# Altium PCB Main.PcbDoc (part 1 of 2)
Units mil, origin at the board's own origin, x right, y up, seen from the top; angles counter-clockwise.
Board outline 5100 x 2800 mil, 4 copper layers (Top Layer, Internal Plane 1, Internal Plane 2, Bottom Layer), stack 30.634 mil thick; 235 components, 176 nets, 754 pads, 178 vias.
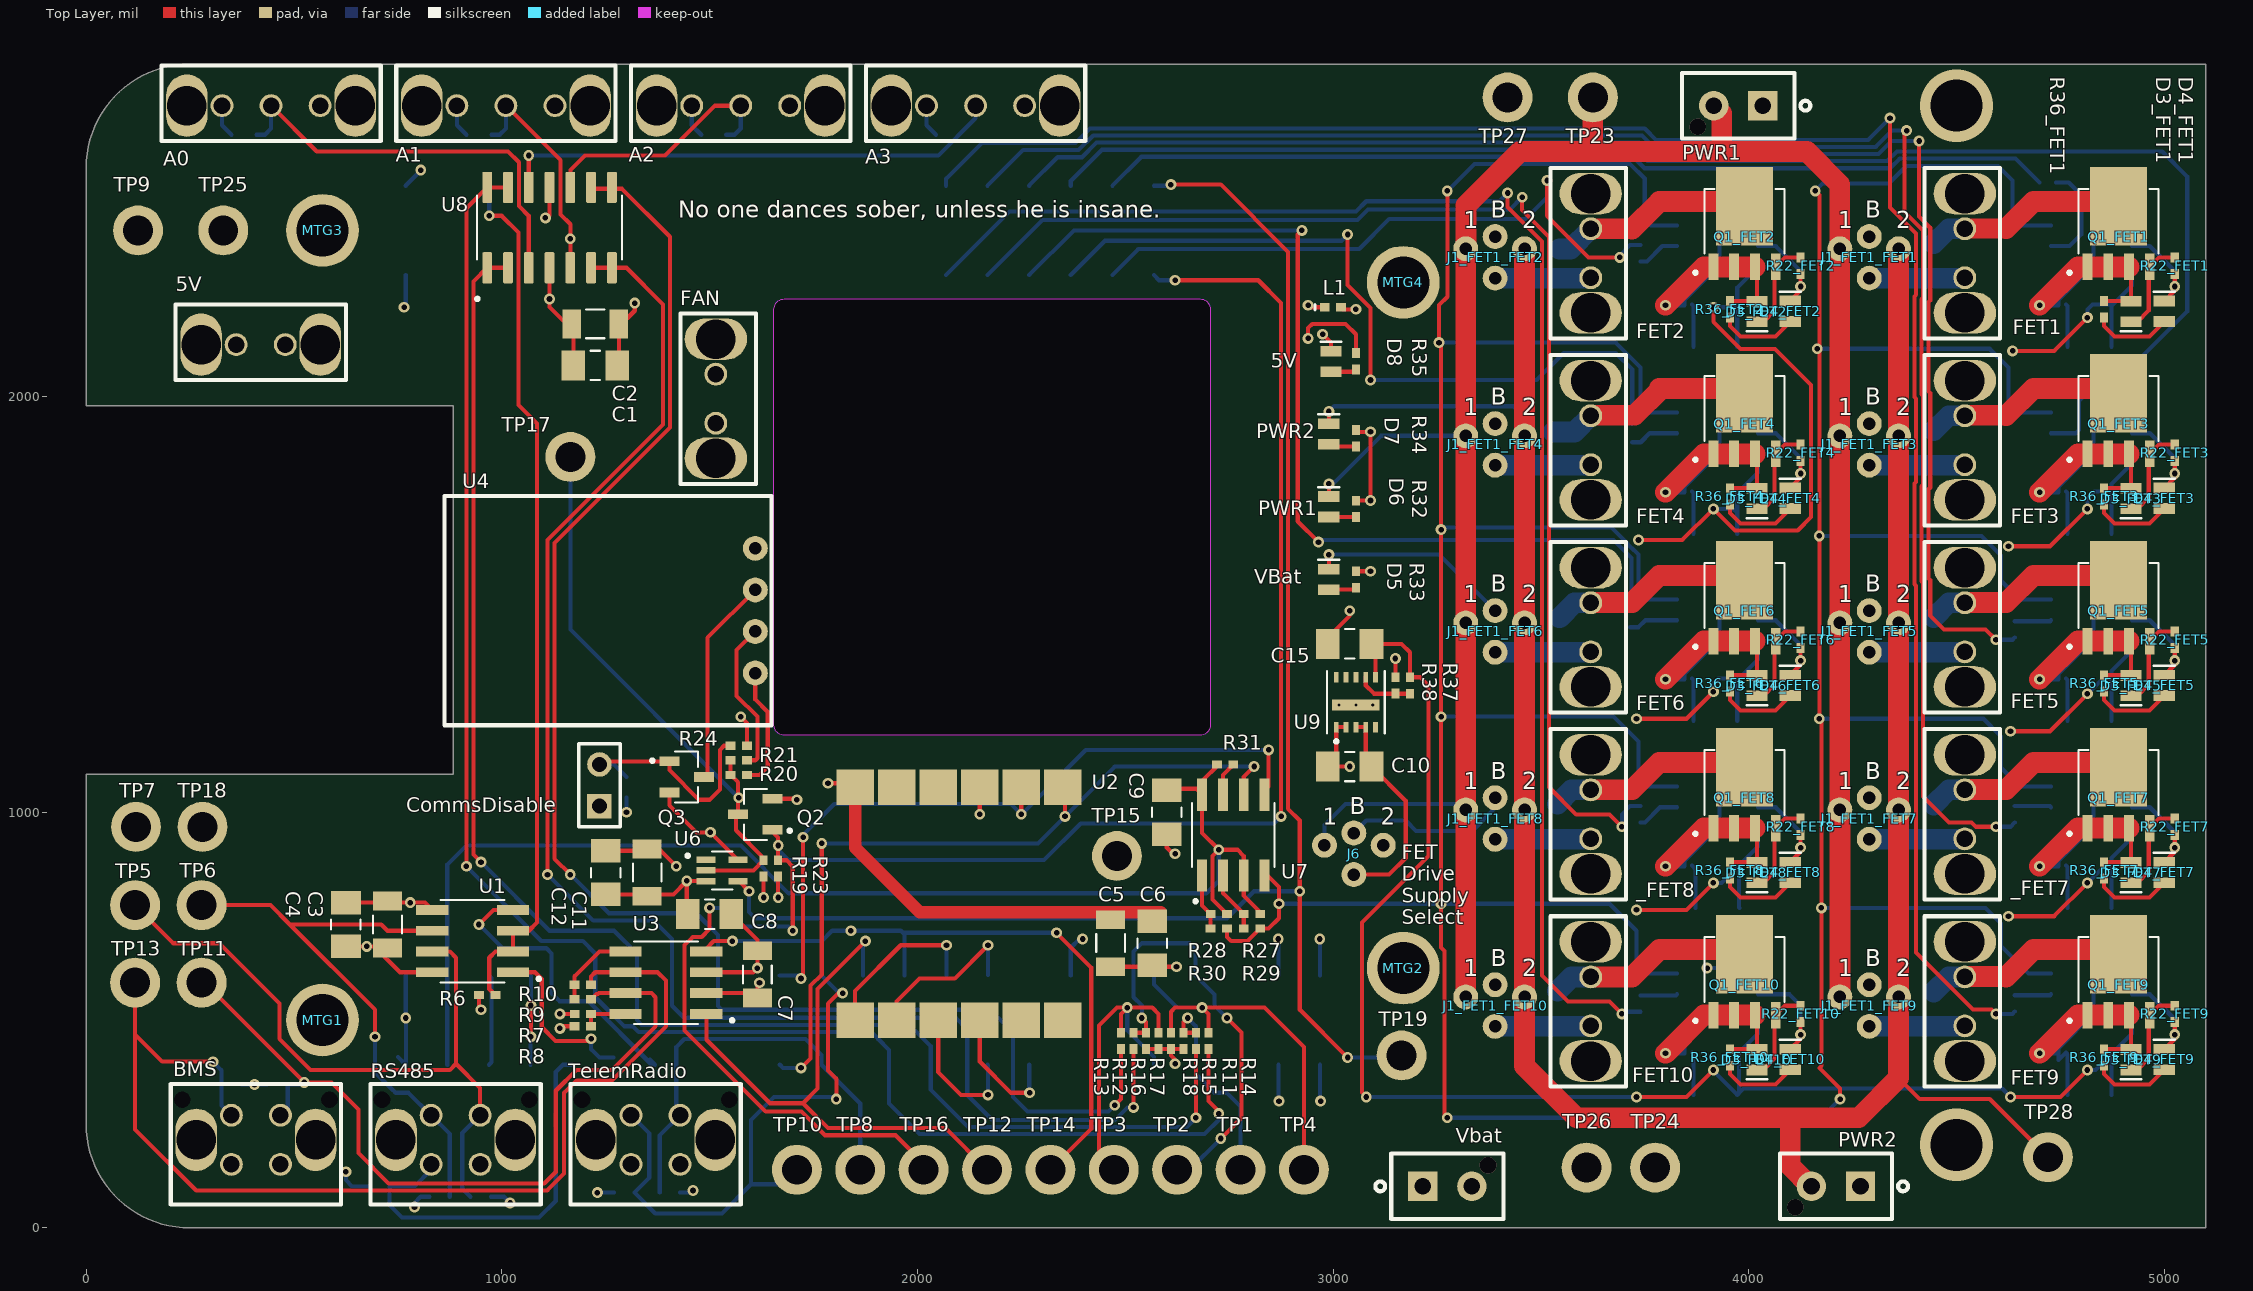
[diagram p0: Top Layer view]
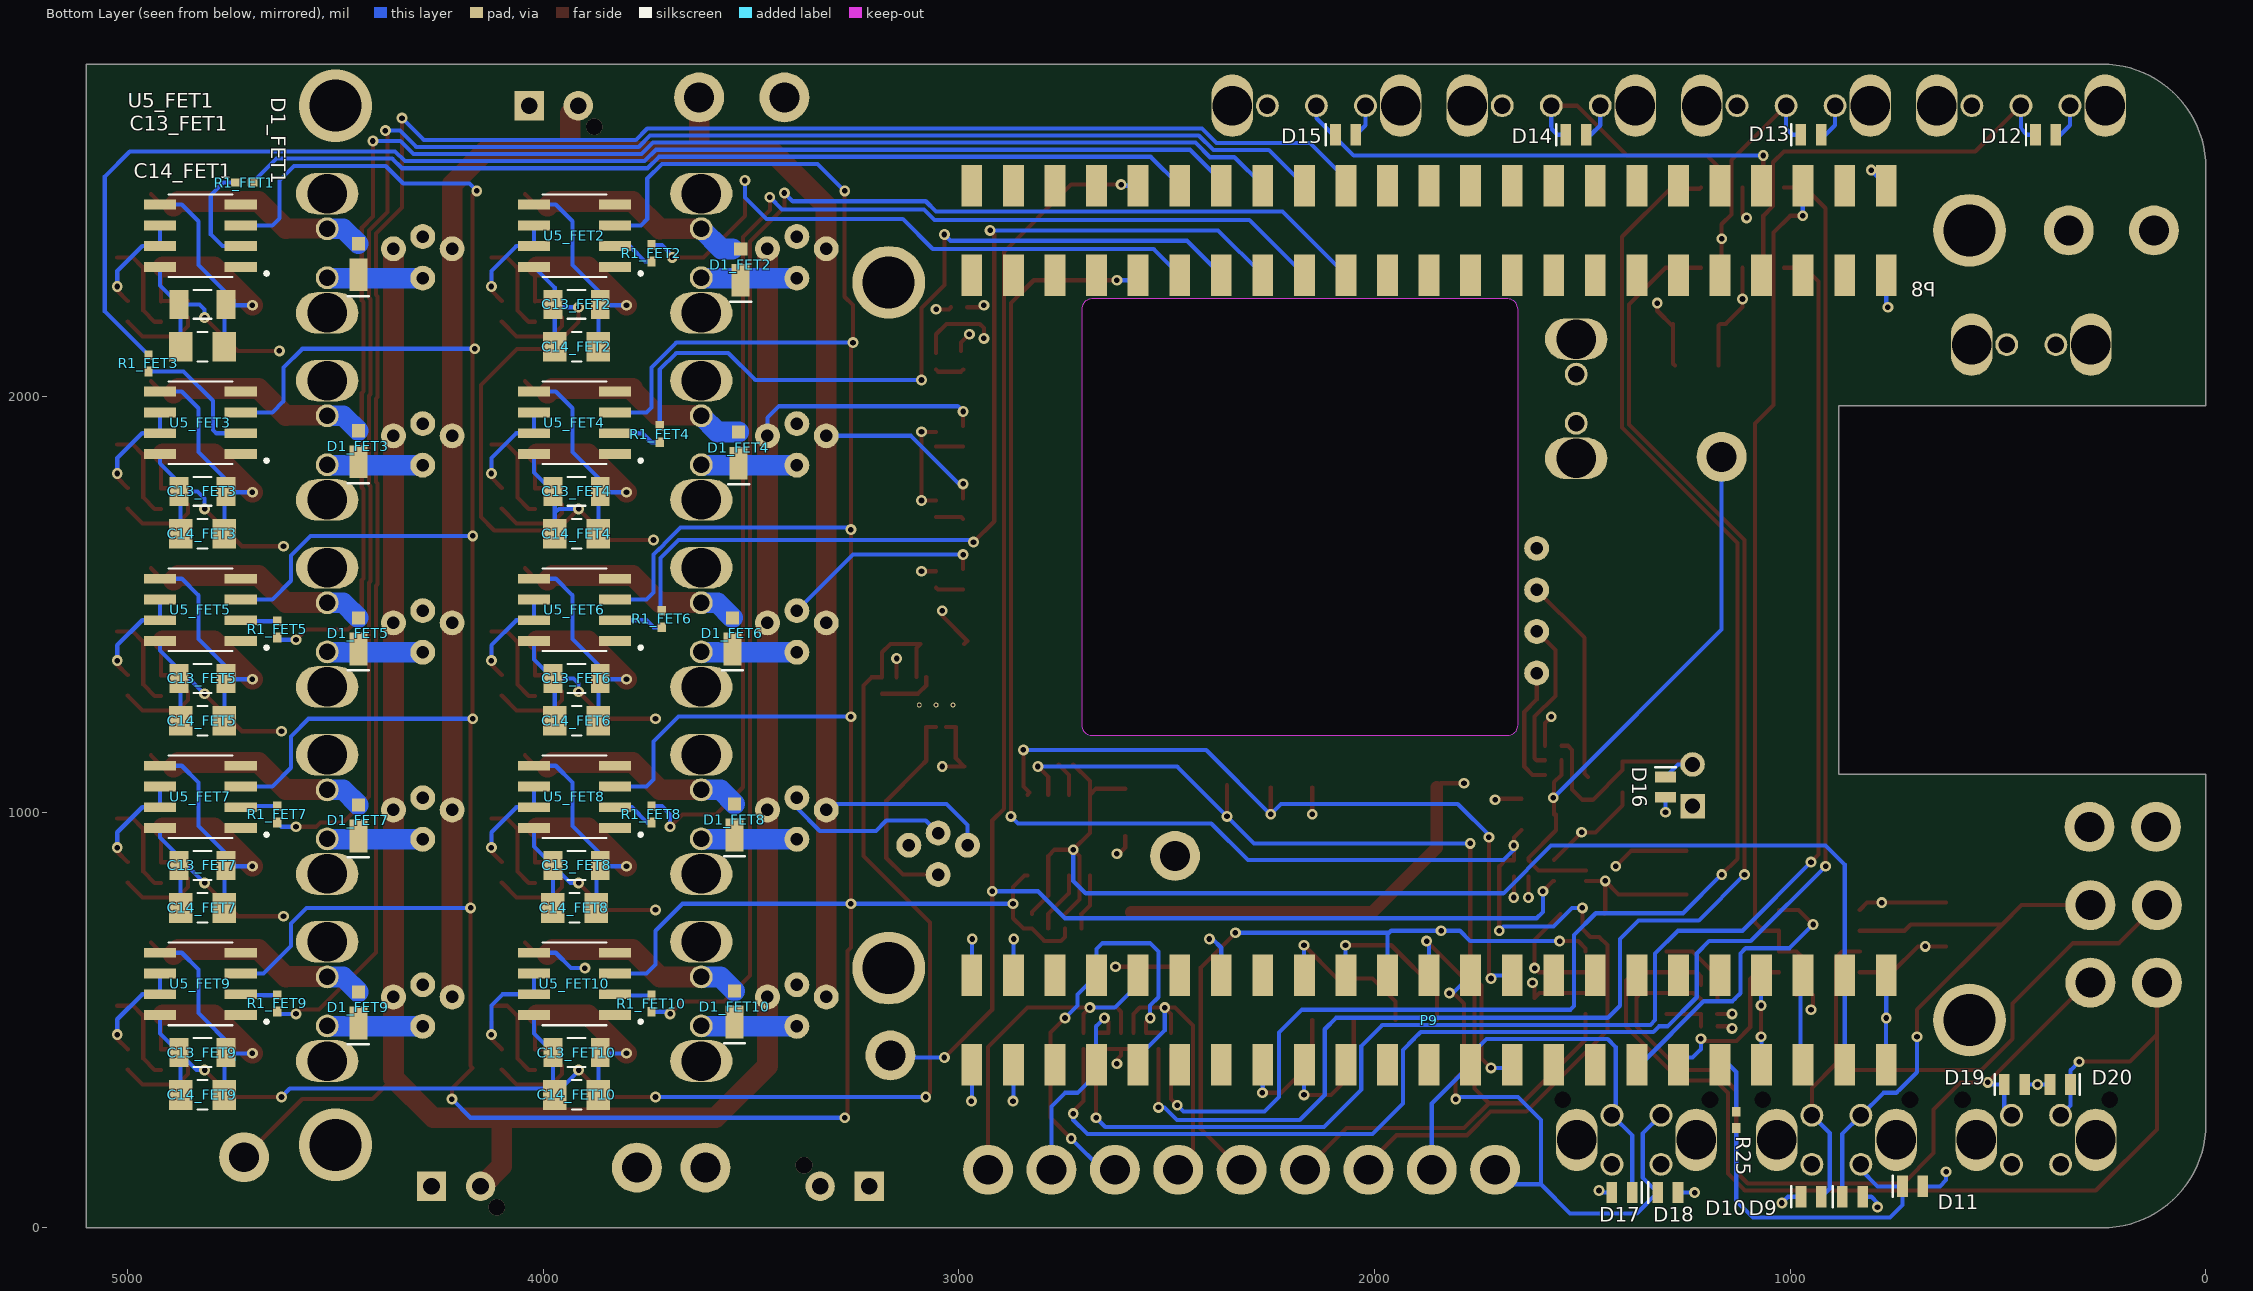
[diagram p1: Bottom Layer view, seen from below]
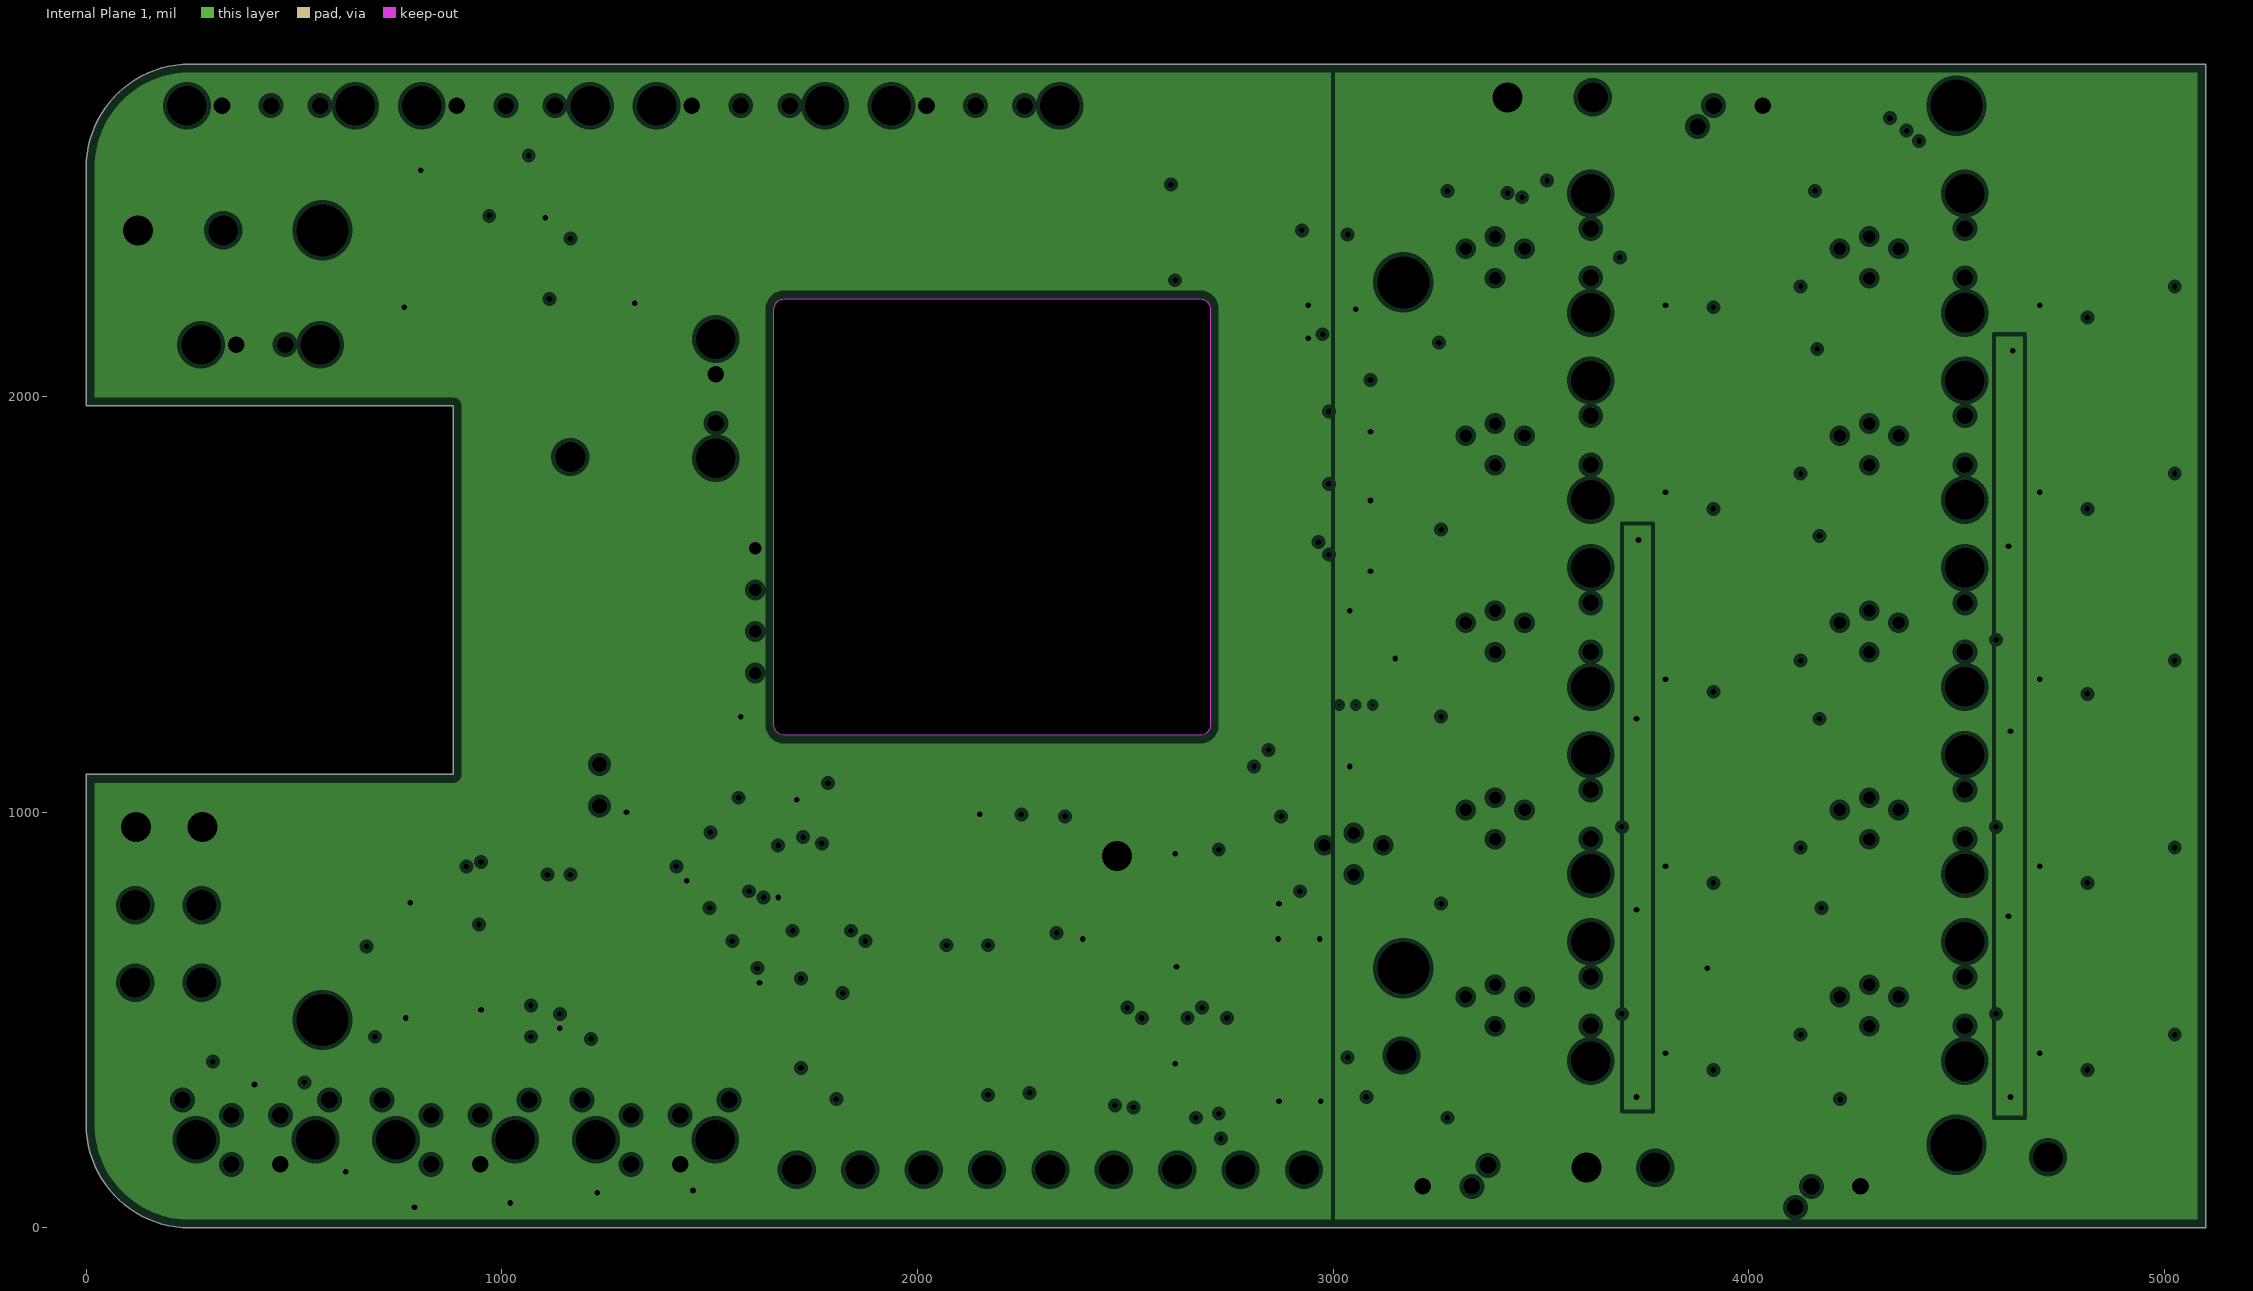
[diagram p2: Internal Plane 1, clearances drawn from the general rule]
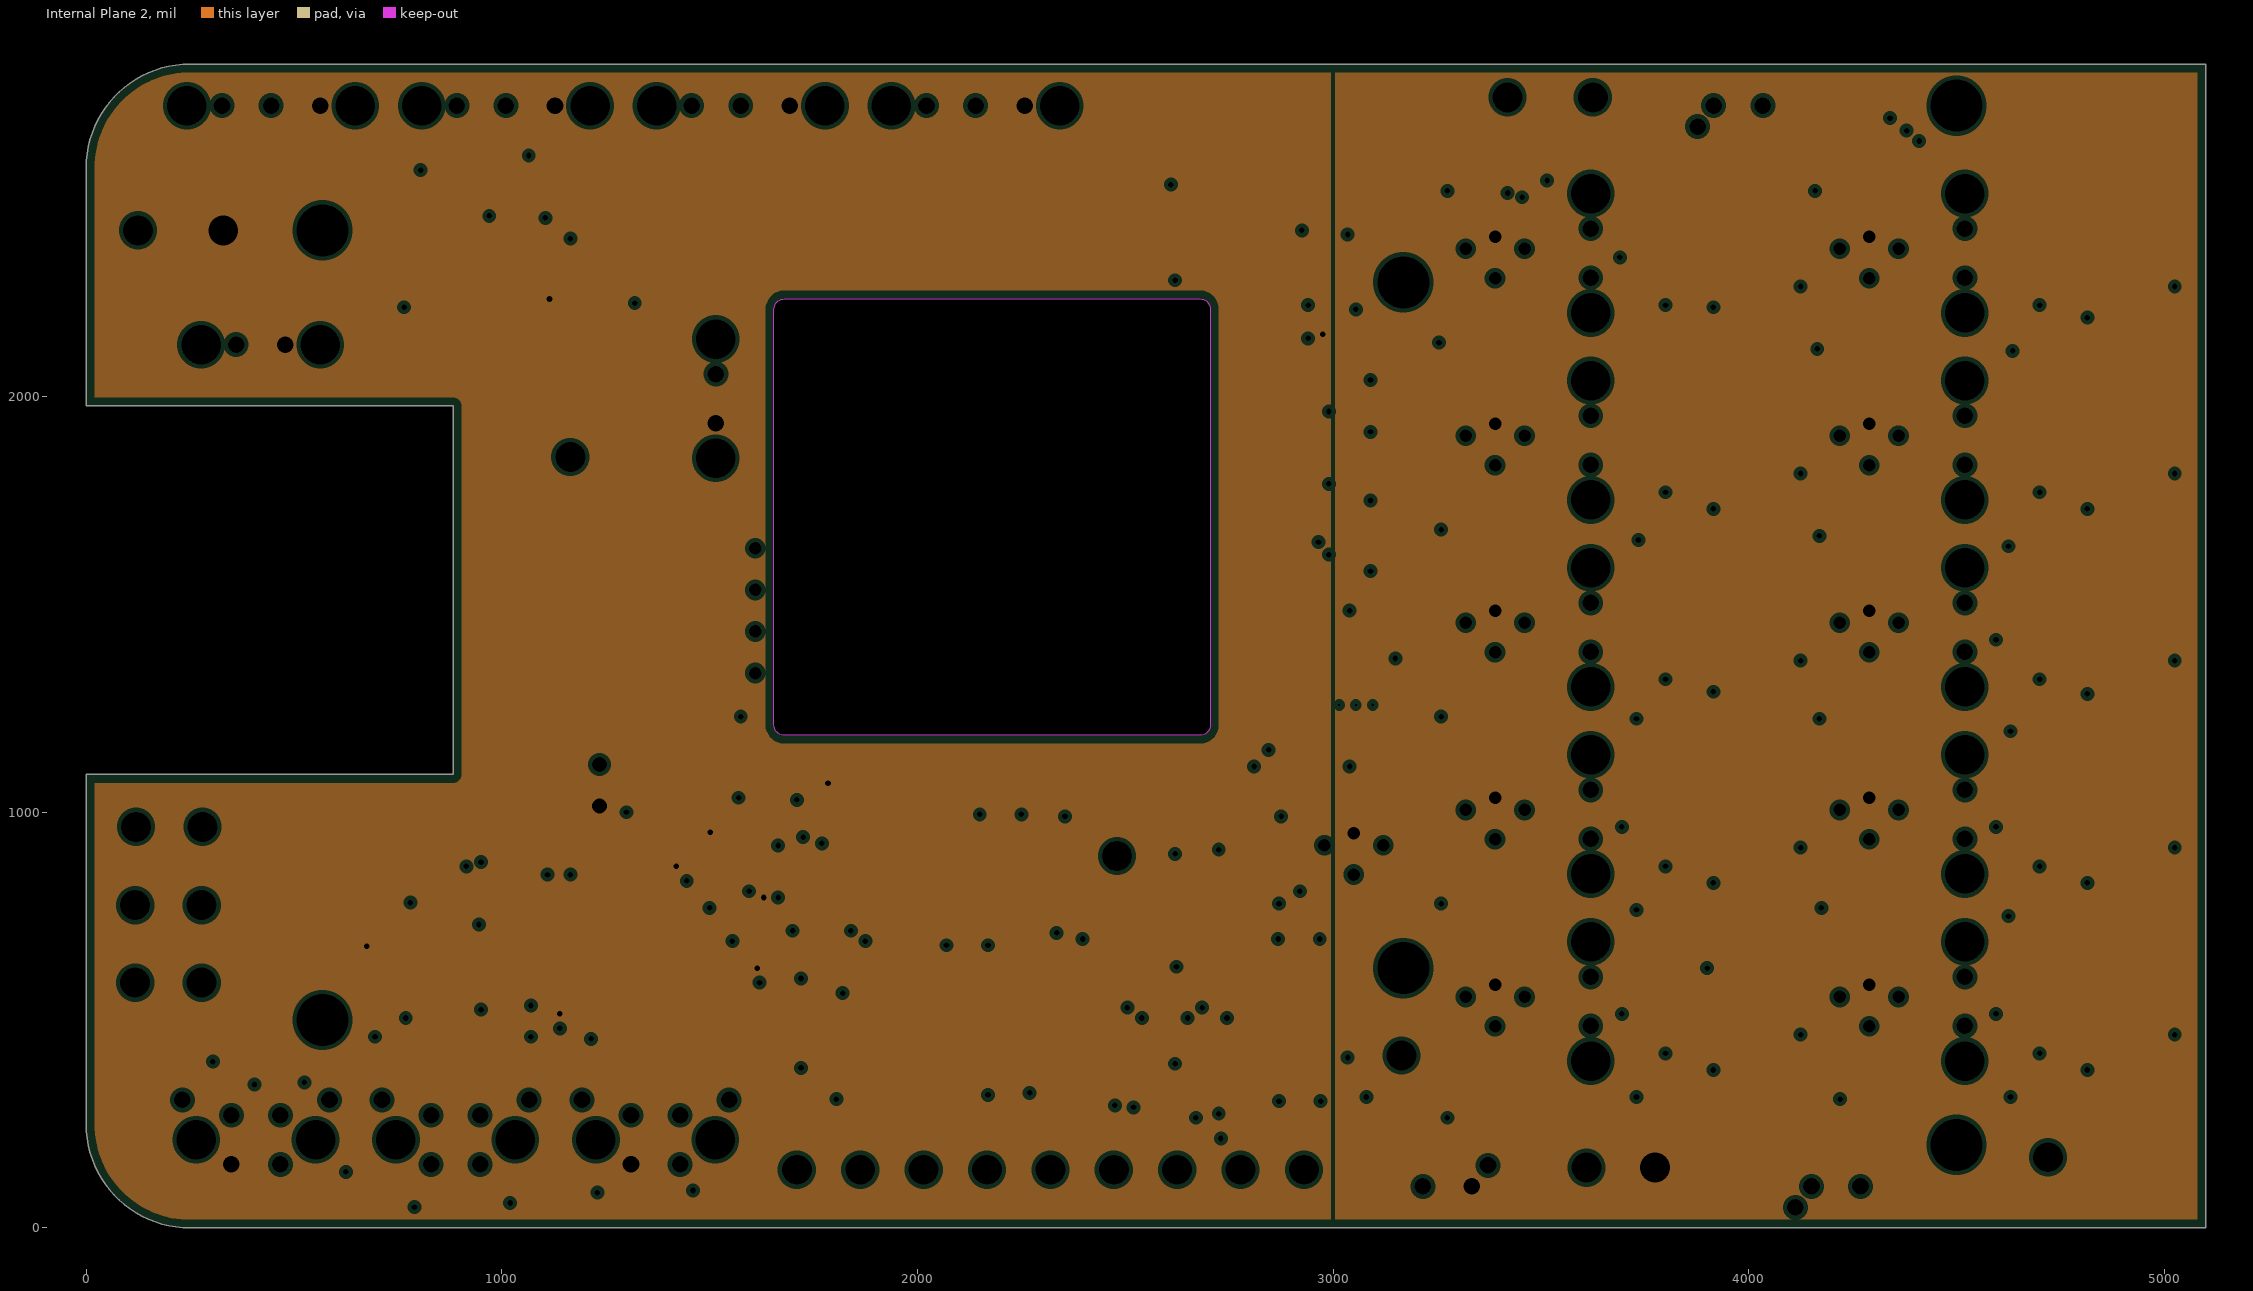
[diagram p3: Internal Plane 2, clearances drawn from the general rule]

## Layer stack, top to bottom
Top Solder: solder mask 0.4, Solder Resist, Dk 3.5
Top Layer: signal copper 1.4
Dielectric 1: core 10, FR-4, Dk 4.2
Internal Plane 1: plane copper 1.417, net (Multiple Nets)
Dielectric 3: prepreg 5, Dk 4.2
Internal Plane 2: plane copper 1.417, net (Multiple Nets)
Dielectric 2: core 10, Dk 4.2
Bottom Layer: signal copper 1.4
Bottom Solder: solder mask 0.4, Solder Resist, Dk 3.5

## Board outline
0,250 ccw(c250,250) 250,0 5100,0 5100,2800 250,2800 ccw(c250,2550) 0,2550 0,1978 883,1978 883,1091 0,1091
cut-out: 1655,2210 cw(c1680,2210) 1680,2235 2680,2235 cw(c2680,2210) 2705,2210 2705,1210 cw(c2680,1210) 2680,1185 1680,1185 cw(c1680,1210) 1655,1210

## Design rules (kind name [scope] priority, off if disabled: settings)
BoardOutlineClearance [All] p1: gap=0 ignorepadtopadclearanceinfootprint=FALSE
Clearance [All] p1: gap=7 ignorepadtopadclearanceinfootprint=FALSE
ComponentClearance [All] p1: gap=6 collisioncheckmode=3 verticalgap=10 showdistances=FALSE
HoleSize [All] p1: absolutevalues=TRUE maxlimit=1000 minlimit=1 maxpercent=80.000 minpercent=20.000
MinimumSolderMaskSliver [All] p1: minsoldermaskwidth=0
PlaneClearance [All] p1: clearance=10
PlaneConnect [All] p1: planeconnectstyle=Relief reliefexpansion=10 reliefentries=4 reliefconductorwidth=10 reliefairgap=10
PolygonConnect [All] p1: connectstyle=Relief reliefconductorwidth=10 reliefentries=4 polygonreliefangle="90 Angle" airgapwidth=10
RoomDefinition FET10 [InComponentClass('FET10')] p1: confinementstyle=ConfineIn formatcopy=TRUE lockcomponents=FALSE outline 3260,270 4175,270 4175,775 3260,775
RoomDefinition FET9 [InComponentClass('FET9')] p2: confinementstyle=ConfineIn formatcopy=TRUE lockcomponents=FALSE outline 4165,265 5075,265 5075,775 4165,775
RoomDefinition FET8 [InComponentClass('FET8')] p3: confinementstyle=ConfineIn formatcopy=TRUE lockcomponents=FALSE outline 3255,720 4175,720 4175,1225 3255,1225
RoomDefinition FET7 [InComponentClass('FET7')] p4: confinementstyle=ConfineIn formatcopy=TRUE lockcomponents=FALSE outline 4165,720 5075,720 5075,1225 4165,1225
RoomDefinition FET6 [InComponentClass('FET6')] p5: confinementstyle=ConfineIn formatcopy=TRUE lockcomponents=FALSE outline 3260,1165 4175,1165 4175,1675 3260,1675
RoomDefinition FET5 [InComponentClass('FET5')] p6: confinementstyle=ConfineIn formatcopy=TRUE lockcomponents=FALSE outline 4165,1165 5075,1165 5075,1675 4165,1675
RoomDefinition FET4 [InComponentClass('FET4')] p7: confinementstyle=ConfineIn formatcopy=TRUE lockcomponents=FALSE outline 3260,1620 4175,1620 4175,2125 3260,2125
RoomDefinition FET3 [InComponentClass('FET3')] p8: confinementstyle=ConfineIn formatcopy=TRUE lockcomponents=FALSE outline 4165,1615 5075,1615 5075,2180 4165,2180
RoomDefinition FET2 [InComponentClass('FET2')] p9: confinementstyle=ConfineIn formatcopy=TRUE lockcomponents=FALSE outline 3260,2065 4190,2065 4190,2575 3260,2575
RoomDefinition FET1 [InComponentClass('FET1')] p10: confinementstyle=ConfineIn formatcopy=TRUE lockcomponents=FALSE outline 4165,2070 5075,2070 5075,2575 4165,2575
RoutingVias [All] p1: holewidth=28 width=50 viastyle="Through Hole" minholewidth=28 minwidth=50 maxholewidth=28 maxwidth=50
SilkToSilkClearance [All] p1: silktosilkclearance=0
SilkToSolderMaskClearance [IsPad] p1 off: minsilkscreentomaskgap=0 clearancetoexposedcopper=TRUE
SolderMaskExpansion [All] p1: expansion=4
Width [All] p1: maxlimit=1000 minlimit=10 preferedwidth=10
23 further rules are at their usual default settings.

## Classes and differential pairs
component class "BeagleBoard Connectors": 5V C9 D5 D6 D7 D8 D17 D18 FAN MTG1 MTG2 MTG3 MTG4 P8 P9 PWR1 PWR2 R27 R28 R29 R30 R31 R32 R33 R34 R35 TelemRadio TP8 TP10 TP23 TP24 TP25 TP26 TP27 TP28 U7 Vbat
component class ADC: A0 A1 A2 A3 C1 C2 D12 D13 D14 D15 R11 R12 R13 R14 R15 R16 R17 R18 TP1 TP2 TP3 TP4 U8
component class BMS: BMS C7 C8 D19 D20 R7 R8 R9 R10 TP11 TP12 TP13 TP14 TP15 U3
component class "ControlRadio Click": C11 C12 CommsDisable D16 Q2 Q3 R19 R20 R21 R23 R24 TP16 TP17 TP18 TP19 U4 U6
component class FET10: C13_FET1_FET10 C13_FET10 C14_FET1_FET10 C14_FET10 D1_FET1_FET10 D1_FET10 D3_FET1_FET10 D3_FET10 D4_FET1_FET10 D4_FET10 FET1_FET10 FET10 J1_FET1_FET10 Q1_FET1_FET10 Q1_FET10 R1_FET1_FET10 R1_FET10 R22_FET1_FET10 R22_FET10 R36_FET1_FET10 R36_FET10 U5_FET1_FET10 U5_FET10
component class FET9: C13_FET1_FET9 C13_FET9 C14_FET1_FET9 C14_FET9 D1_FET1_FET9 D1_FET9 D3_FET1_FET9 D3_FET9 D4_FET1_FET9 D4_FET9 FET1_FET9 FET9 J1_FET1_FET9 Q1_FET1_FET9 Q1_FET9 R1_FET1_FET9 R1_FET9 R22_FET1_FET9 R22_FET9 R36_FET1_FET9 R36_FET9 U5_FET1_FET9 U5_FET9
component class FET8: _FET8 C13_FET1_FET8 C13_FET8 C14_FET1_FET8 C14_FET8 D1_FET1_FET8 D1_FET8 D3_FET1_FET8 D3_FET8 D4_FET1_FET8 D4_FET8 J1_FET1_FET8 Q1_FET1_FET8 Q1_FET8 R1_FET1_FET8 R1_FET8 R22_FET1_FET8 R22_FET8 R36_FET1_FET8 R36_FET8 U5_FET1_FET8 U5_FET8
component class FET7: _FET7 C13_FET1_FET7 C13_FET7 C14_FET1_FET7 C14_FET7 D1_FET1_FET7 D1_FET7 D3_FET1_FET7 D3_FET7 D4_FET1_FET7 D4_FET7 FET1_FET7 J1_FET1_FET7 Q1_FET1_FET7 Q1_FET7 R1_FET1_FET7 R1_FET7 R22_FET1_FET7 R22_FET7 R36_FET1_FET7 R36_FET7 U5_FET1_FET7 U5_FET7
component class FET6: C13_FET1_FET6 C13_FET6 C14_FET1_FET6 C14_FET6 D1_FET1_FET6 D1_FET6 D3_FET1_FET6 D3_FET6 D4_FET1_FET6 D4_FET6 FET1_FET6 FET6 J1_FET1_FET6 Q1_FET1_FET6 Q1_FET6 R1_FET1_FET6 R1_FET6 R22_FET1_FET6 R22_FET6 R36_FET1_FET6 R36_FET6 U5_FET1_FET6 U5_FET6
component class FET5: C13_FET1_FET5 C13_FET5 C14_FET1_FET5 C14_FET5 D1_FET1_FET5 D1_FET5 D3_FET1_FET5 D3_FET5 D4_FET1_FET5 D4_FET5 FET5 J1_FET1_FET5 Q1_FET1_FET5 Q1_FET5 R1_FET1_FET5 R1_FET5 R22_FET1_FET5 R22_FET5 R36_FET1_FET5 R36_FET5 U5_FET1_FET5 U5_FET5
component class FET4: C13_FET1_FET4 C13_FET4 C14_FET1_FET4 C14_FET4 D1_FET1_FET4 D1_FET4 D3_FET1_FET4 D3_FET4 D4_FET1_FET4 D4_FET4 FET4 J1_FET1_FET4 Q1_FET1_FET4 Q1_FET4 R1_FET1_FET4 R1_FET4 R22_FET1_FET4 R22_FET4 R36_FET1_FET4 R36_FET4 U5_FET1_FET4 U5_FET4
component class FET3: C13_FET1_FET3 C13_FET3 C14_FET1_FET3 C14_FET3 D1_FET1_FET3 D1_FET3 D3_FET1_FET3 D3_FET3 D4_FET1_FET3 D4_FET3 FET1_FET3 FET3 J1_FET1_FET3 Q1_FET1_FET3 Q1_FET3 R1_FET1_FET3 R1_FET3 R22_FET1_FET3 R22_FET3 R36_FET1_FET3 R36_FET3 U5_FET1_FET3 U5_FET3
component class FET2: C13_FET1_FET2 C13_FET2 C14_FET1_FET2 C14_FET2 D1_FET1_FET2 D1_FET2 D3_FET1_FET2 D3_FET2 D4_FET1_FET2 D4_FET2 FET2 J1_FET1_FET2 Q1_FET1_FET2 Q1_FET2 R1_FET1_FET2 R1_FET2 R22_FET1_FET2 R22_FET2 R36_FET1_FET2 R36_FET2 U5_FET1_FET2 U5_FET2
component class FET1: C13_FET1 C13_FET1_FET1 C14_FET1 C14_FET1_FET1 D1_FET1 D1_FET1_FET1 D3_FET1 D3_FET1_FET1 D4_FET1 D4_FET1_FET1 FET1 FET1_FET1 J1_FET1_FET1 Q1_FET1 Q1_FET1_FET1 R1_FET1 R1_FET1_FET1 R22_FET1 R22_FET1_FET1 R36_FET1 R36_FET1_FET1 U5_FET1 U5_FET1_FET1
component class RS485: C3 C4 D9 D10 D11 R6 R25 RS485 TP5 TP6 TP7 U1
component class IMU: C5 C6 TP9 U2
channel class FET: FET1 FET2 FET3 FET4 FET5 FET6 FET7 FET8 FET9 FET10
component class SSRs: C10 C15 J6 L1 R37 R38 U9

## Components (designator, comment, footprint, x,y, rotation, side; value= is the part's Value field where it differs from the comment)
5V "043650-0220" 43650-0220 420,2125 r180 top
_FET7 "043650-0220" 43650-0220 4520,995 r270 top
_FET8 "043650-0220" 43650-0220 3620,995 r270 top
A0 "043650-0320" 43650-0320 445,2700 r180 top
A1 "043650-0320" 43650-0320 1010,2700 r180 top
A2 "043650-0320" 43650-0320 1575,2700 r180 top
A3 "043650-0320" 43650-0320 2140,2700 r180 top
BMS "43045-0426" 43045-0426 408.5,212 r0 top
C1 "Cap" RESC3116X65N 1225,2175 r180 top value=1uF
C2 "Cap" CAPC3216X180N 1225,2075 r180 top value=10uF
C3 "Cap" RESC3116X65N 725,730 r270 top value=1uF
C4 "Cap" CAPC3216X180N 625,730 r270 top value=10uF
C5 "Cap" RESC3116X65N 2465,685 r90 top value=1uF
C6 "Cap" CAPC3216X180N 2565,685 r90 top value=10uF
C7 "Cap" RESC3116X65N 1615,610 r90 top value=1uF
C8 "Cap" CAPC3216X180N 1500,755 r0 top value=10uF
C9 "Cap" CAPC3216X180N 2600,1000 r90 top value=10uF
C10 "Cap" CAPC3216X180N 3040,1110 r0 top value=10uF
C11 "Cap" RESC3116X65N 1350,855 r90 top value=1uF
C12 "Cap" CAPC3216X180N 1250,855 r90 top value=10uF
C13_FET1 "Cap" RESC3116X65N 4820,2222.01 r0 bottom value=1uF (schematic designator C13)
C13_FET2 "Cap" RESC3116X65N 3920,2222.01 r0 bottom value=1uF (schematic designator C13)
C13_FET3 "Cap" RESC3116X65N 4820,1772.01 r0 bottom value=1uF (schematic designator C13)
C13_FET4 "Cap" RESC3116X65N 3920,1772.01 r0 bottom value=1uF (schematic designator C13)
C13_FET5 "Cap" RESC3116X65N 4820,1322.01 r0 bottom value=1uF (schematic designator C13)
C13_FET6 "Cap" RESC3116X65N 3920,1322.01 r0 bottom value=1uF (schematic designator C13)
C13_FET7 "Cap" RESC3116X65N 4820,872.01 r0 bottom value=1uF (schematic designator C13)
C13_FET8 "Cap" RESC3116X65N 3920,872.01 r0 bottom value=1uF (schematic designator C13)
C13_FET9 "Cap" RESC3116X65N 4820,422.01 r0 bottom value=1uF (schematic designator C13)
C13_FET10 "Cap" RESC3116X65N 3920,422.01 r0 bottom value=1uF (schematic designator C13)
C14_FET1 "Cap" CAPC3216X180N 4820,2120 r0 bottom value=10uF (schematic designator C14)
C14_FET2 "Cap" CAPC3216X180N 3920,2120 r0 bottom value=10uF (schematic designator C14)
C14_FET3 "Cap" CAPC3216X180N 4820,1670 r0 bottom value=10uF (schematic designator C14)
C14_FET4 "Cap" CAPC3216X180N 3920,1670 r0 bottom value=10uF (schematic designator C14)
C14_FET5 "Cap" CAPC3216X180N 4820,1220 r0 bottom value=10uF (schematic designator C14)
C14_FET6 "Cap" CAPC3216X180N 3920,1220 r0 bottom value=10uF (schematic designator C14)
C14_FET7 "Cap" CAPC3216X180N 4820,770 r0 bottom value=10uF (schematic designator C14)
C14_FET8 "Cap" CAPC3216X180N 3925,770 r0 bottom value=10uF (schematic designator C14)
C14_FET9 "Cap" CAPC3216X180N 4820,320 r0 bottom value=10uF (schematic designator C14)
C14_FET10 "Cap" CAPC3216X180N 3920,320 r0 bottom value=10uF (schematic designator C14)
C15 "Cap" CAPC3216X180N 3040,1405 r0 top value=22uF
CommsDisable "Header 2" HDR1X2 1235,1015 r90 top
D1_FET1 "Schottky" V2PM12HM3/H 4445,2292.99 r90 bottom (schematic designator D1)
D1_FET2 "Schottky" V2PM12HM3/H 3525,2280 r90 bottom (schematic designator D1)
D1_FET3 "Schottky" V2PM12HM3/H 4445,1842.99 r90 bottom (schematic designator D1)
D1_FET4 "Schottky" V2PM12HM3/H 3530,1840 r90 bottom (schematic designator D1)
D1_FET5 "Schottky" V2PM12HM3/H 4445,1392.99 r90 bottom (schematic designator D1)
D1_FET6 "Schottky" V2PM12HM3/H 3545,1392.99 r90 bottom (schematic designator D1)
D1_FET7 "Schottky" V2PM12HM3/H 4445,942.99 r90 bottom (schematic designator D1)
D1_FET8 "Schottky" V2PM12HM3/H 3540,945.2 r90 bottom (schematic designator D1)
D1_FET9 "Schottky" V2PM12HM3/H 4445,492.99 r90 bottom (schematic designator D1)
D1_FET10 "Schottky" V2PM12HM3/H 3540,495.2 r90 bottom (schematic designator D1)
D3_FET1 "13V" THRMC0603X33N 4920,2167.2 r90 top (schematic designator D3)
D3_FET2 "13V" THRMC0603X33N 4020,2167.2 r90 top (schematic designator D3)
D3_FET3 "13V" THRMC0603X33N 4920,1717.2 r90 top (schematic designator D3)
D3_FET4 "13V" THRMC0603X33N 4020,1717.2 r90 top (schematic designator D3)
D3_FET5 "13V" THRMC0603X33N 4920,1267.2 r90 top (schematic designator D3)
D3_FET6 "13V" THRMC0603X33N 4020,1267.2 r90 top (schematic designator D3)
D3_FET7 "13V" THRMC0603X33N 4920,817.2 r90 top (schematic designator D3)
D3_FET8 "13V" THRMC0603X33N 4020,817.2 r90 top (schematic designator D3)
D3_FET9 "13V" THRMC0603X33N 4920,367.2 r90 top (schematic designator D3)
D3_FET10 "13V" THRMC0603X33N 4020,367.2 r90 top (schematic designator D3)
D4_FET1 "LED0" THRMC0603X33N 5000,2242.8 r270 top (schematic designator D4)
D4_FET2 "LED0" THRMC0603X33N 4100,2242.8 r270 top (schematic designator D4)
D4_FET3 "LED0" THRMC0603X33N 5000,1792.8 r270 top (schematic designator D4)
D4_FET4 "LED0" THRMC0603X33N 4100,1792.8 r270 top (schematic designator D4)
D4_FET5 "LED0" THRMC0603X33N 5000,1342.8 r270 top (schematic designator D4)
D4_FET6 "LED0" THRMC0603X33N 4100,1342.8 r270 top (schematic designator D4)
D4_FET7 "LED0" THRMC0603X33N 5000,892.8 r270 top (schematic designator D4)
D4_FET8 "LED0" THRMC0603X33N 4100,892.8 r270 top (schematic designator D4)
D4_FET9 "LED0" THRMC0603X33N 5000,442.8 r270 top (schematic designator D4)
D4_FET10 "LED0" THRMC0603X33N 4100,442.8 r270 top (schematic designator D4)
D5 "LED0" THRMC0603X33N 2990,1597.8 r270 top
D6 "LED0" THRMC0603X33N 2990,1772.53 r270 top
D7 "LED0" THRMC0603X33N 2990,1947.27 r270 top
D8 "LED0" THRMC0603X33N 2995,2122.01 r270 top
D9 "Bidirectional 5V" THRMC0603X33N 887.8,75 r180 bottom
D10 "Bidirectional 5V" THRMC0603X33N 987.01,75 r180 bottom
D11 "Bidirectional 3.3V" THRMC0603X33N 742.8,100 r180 bottom
D12 "Bidirectional 5V" THRMC0603X33N 422.8,2630 r180 bottom
D13 "Bidirectional 5V" THRMC0603X33N 987.8,2630 r180 bottom
D14 "Bidirectional 5V" THRMC0603X33N 1552.8,2630 r180 bottom
D15 "Bidirectional 5V" THRMC0603X33N 2107.01,2630 r180 bottom
D16 "Bidirectional 5V" THRMC0603X33N 1300,1097.8 r270 bottom
D17 "Bidirectional 3.3V" THRMC0603X33N 1367.2,85 r0 bottom
D18 "Bidirectional 3.3V" THRMC0603X33N 1332.01,85 r180 bottom
D19 "Bidirectional 5V" THRMC0603X33N 497.8,345 r180 bottom
D20 "Bidirectional 5V" THRMC0603X33N 312.99,345 r0 bottom
FAN "043650-0220" 43650-0220 1515,1995 r90 top
FET1 "043650-0220" 43650-0220 4520,2345 r270 top
FET2 "043650-0220" 43650-0220 3620,2345 r270 top
FET3 "043650-0220" 43650-0220 4520,1895 r270 top
FET4 "043650-0220" 43650-0220 3620,1895 r270 top
FET5 "043650-0220" 43650-0220 4520,1445 r270 top
FET6 "043650-0220" 43650-0220 3620,1445 r270 top
FET9 "043650-0220" 43650-0220 4520,545 r270 top
FET10 "043650-0220" 43650-0220 3620,545 r270 top
J1_FET1_FET1 "Jumper Block" "JUMPER BLOCK" 4290,2285 r0 top (schematic designator J1_FET1)
J1_FET1_FET2 "Jumper Block" "JUMPER BLOCK" 3390,2285 r0 top (schematic designator J1_FET1)
J1_FET1_FET3 "Jumper Block" "JUMPER BLOCK" 4290,1835 r0 top (schematic designator J1_FET1)
J1_FET1_FET4 "Jumper Block" "JUMPER BLOCK" 3390,1835 r0 top (schematic designator J1_FET1)
J1_FET1_FET5 "Jumper Block" "JUMPER BLOCK" 4290,1385 r0 top (schematic designator J1_FET1)
J1_FET1_FET6 "Jumper Block" "JUMPER BLOCK" 3390,1385 r0 top (schematic designator J1_FET1)
J1_FET1_FET7 "Jumper Block" "JUMPER BLOCK" 4290,935 r0 top (schematic designator J1_FET1)
J1_FET1_FET8 "Jumper Block" "JUMPER BLOCK" 3390,935 r0 top (schematic designator J1_FET1)
J1_FET1_FET9 "Jumper Block" "JUMPER BLOCK" 4290,485 r0 top (schematic designator J1_FET1)
J1_FET1_FET10 "Jumper Block" "JUMPER BLOCK" 3390,485 r0 top (schematic designator J1_FET1)
J6 "Jumper Block" "JUMPER BLOCK" 3050,850 r0 top
L1 "Inductor" 0402-A 2999.69,2215 r0 top
MTG1 "MHOLE" MTGH200C125D_PL 569,515.5 r90 top
MTG2 "MHOLE" MTGH200C125D_PL 3169,640.5 r90 top
MTG3 "MHOLE" MTGH200C125D_PL 569,2415.5 r90 top
MTG4 "MHOLE" MTGH200C125D_PL 3169,2290.5 r90 top
P8 "MALE HEADER 2x23" 95278-101B46LF 769,2292.52 r0 bottom locked
P9 "MALE HEADER 2x23" 95278-101B46LF 769,392.52 r0 bottom locked
PWR1 "206832-0202" 206832-0202 3975,2700 r90 top
PWR2 "206832-0202" 206832-0202 4210,100 r90 top
Q1_FET1 "PSMN011-100YSFX" DPAK127P_600X120-5N 4890,2416.34 r0 top (schematic designator Q1)
Q1_FET2 "PSMN011-100YSFX" DPAK127P_600X120-5N 3990,2416.34 r0 top (schematic designator Q1)
Q1_FET3 "PSMN011-100YSFX" DPAK127P_600X120-5N 4890,1966.34 r0 top (schematic designator Q1)
Q1_FET4 "PSMN011-100YSFX" DPAK127P_600X120-5N 3990,1966.34 r0 top (schematic designator Q1)
Q1_FET5 "PSMN011-100YSFX" DPAK127P_600X120-5N 4890,1516.34 r0 top (schematic designator Q1)
Q1_FET6 "PSMN011-100YSFX" DPAK127P_600X120-5N 3990,1516.34 r0 top (schematic designator Q1)
Q1_FET7 "PSMN011-100YSFX" DPAK127P_600X120-5N 4890,1066.34 r0 top (schematic designator Q1)
Q1_FET8 "PSMN011-100YSFX" DPAK127P_600X120-5N 3990,1066.34 r0 top (schematic designator Q1)
Q1_FET9 "PSMN011-100YSFX" DPAK127P_600X120-5N 4890,616.34 r0 top (schematic designator Q1)
Q1_FET10 "PSMN011-100YSFX" DPAK127P_600X120-5N 3990,616.34 r0 top (schematic designator Q1)
Q2 "SSM3K339R,LF" SOT95P237X112-3N 1610,995 r180 top
Q3 "SSM3J338R" SOT95P237X112-3N 1445,1085 r0 top
R1_FET1 "Res1" 0402 4719.69,2515 r0 bottom value=64.0 (schematic designator R1)
R1_FET2 "Res1" 0402 3740,2345 r270 bottom value=64.0 (schematic designator R1)
R1_FET3 "Res1" 0402 4950,2080 r270 bottom value=64.0 (schematic designator R1)
R1_FET4 "Res1" 0402 3720,1910 r270 bottom value=64.0 (schematic designator R1)
R1_FET5 "Res1" 0402 4640,1440 r90 bottom value=64.0 (schematic designator R1)
R1_FET6 "Res1" 0402 3715,1465 r270 bottom value=64.0 (schematic designator R1)
R1_FET7 "Res1" 0402 4640,995 r90 bottom value=64.0 (schematic designator R1)
R1_FET8 "Res1" 0402 3740,995 r270 bottom value=64.0 (schematic designator R1)
R1_FET9 "Res1" 0402 4640,540 r90 bottom value=64.0 (schematic designator R1)
R1_FET10 "Res1" 0402 3740,539.69 r90 bottom value=64.0 (schematic designator R1)
R6 "Res1" 0402 965,560 r180 top value=4k7
R7 "Res1" 0402 1195.31,515 r0 top value=0
R8 "Res1" 0402 1195,485 r180 top value=0
R9 "Res1" 0402 1195,550 r180 top value=60.4
R10 "Res1" 0402 1195,585 r0 top value=60.4
R11 "Res1" 0402 2670,450 r270 top value=1K65
R12 "Res1" 0402 2520,450 r270 top value=1K65
R13 "Res1" 0402 2490,450 r270 top value=1K65
R14 "Res1" 0402 2700,450 r270 top value=1K65
R15 "Res1" 0402 2640,450 r90 top value=909
R16 "Res1" 0402 2550,450 r90 top value=909
R17 "Res1" 0402 2580,450 r90 top value=909
R18 "Res1" 0402 2610,450 r90 top value=909
R19 "Res1" 0402 1630,865 r90 top value=4k7
R20 "Res1" 0402 1570.32,1090 r0 top value=0
R21 "Res1" 0402 1570.32,1125 r0 top value=0
R22_FET1 "Res1" 0402 5025,2315 r90 top value=64.0 (schematic designator R22)
R22_FET2 "Res1" 0402 4125,2315 r90 top value=64.0 (schematic designator R22)
R22_FET3 "Res1" 0402 5025,1865 r90 top value=64.0 (schematic designator R22)
R22_FET4 "Res1" 0402 4125,1865 r90 top value=64.0 (schematic designator R22)
R22_FET5 "Res1" 0402 5025,1415 r90 top value=64.0 (schematic designator R22)
R22_FET6 "Res1" 0402 4125,1415 r90 top value=64.0 (schematic designator R22)
R22_FET7 "Res1" 0402 5025,965 r90 top value=64.0 (schematic designator R22)
R22_FET8 "Res1" 0402 4125,965 r90 top value=64.0 (schematic designator R22)
R22_FET9 "Res1" 0402 5025,515 r90 top value=64.0 (schematic designator R22)
R22_FET10 "Res1" 0402 4125,515 r90 top value=64.0 (schematic designator R22)
R23 "Res1" 0402 1665,865 r270 top value=4k7
R24 "Res1" 0402 1570.32,1160 r0 top value=4k7
R25 "Res1" 0402 1130,260 r270 bottom value=64.0
R27 "Res1" 0402 2805,755 r0 top value=0
R28 "Res1" 0402 2725.31,755 r0 top value=0
R29 "Res1" 0402 2805,720 r180 top value=0
R30 "Res1" 0402 2725,720 r180 top value=0
R31 "Res1" 0402 2740.31,1115 r0 top value=4k7
R32 "Res1" 0402 3055,1730 r90 top value=2.49k
R33 "Res1" 0402 3055,1560 r90 top value=2.49k
R34 "Res1" 0402 3055,1900 r90 top value=2.49k
R35 "Res1" 0402 3055,2085 r90 top value=200
R36_FET1 "Res1" 0402 4855,2210 r270 top value=909 (schematic designator R36)
R36_FET2 "Res1" 0402 3955,2210 r270 top value=909 (schematic designator R36)
R36_FET3 "Res1" 0402 4855,1760 r270 top value=909 (schematic designator R36)
R36_FET4 "Res1" 0402 3955,1760 r270 top value=909 (schematic designator R36)
R36_FET5 "Res1" 0402 4855,1310 r270 top value=909 (schematic designator R36)
R36_FET6 "Res1" 0402 3955,1310 r270 top value=909 (schematic designator R36)
R36_FET7 "Res1" 0402 4855,860 r270 top value=909 (schematic designator R36)
R36_FET8 "Res1" 0402 3955,860 r270 top value=909 (schematic designator R36)
R36_FET9 "Res1" 0402 4855,410 r270 top value=909 (schematic designator R36)
R36_FET10 "Res1" 0402 3955,410 r270 top value=909 (schematic designator R36)
R37 "Res1" 0402 3185,1305 r90 top value=1K65
R38 "Res1" 0402 3150,1305.32 r270 top value=150
RS485 "43045-0426" 43045-0426 889,212 r0 top
TelemRadio "43045-0426" 43045-0426 1370,212 r0 top
TP1 "Socket" 5006 2777.5,140 r0 top
TP2 "Socket" 5006 2625,140 r0 top
TP3 "Socket" 5006 2472.5,140 r0 top
TP4 "Socket" 5006 2930,140 r0 top
TP5 "Socket" 5006 118,776.5 r0 top
TP6 "Socket" 5006 278,776.5 r0 top
TP7 "Socket" 5006 120,965 r0 top
TP8 "Socket" 5006 1862.5,140 r0 top
TP9 "Socket" 5006 125,2400 r0 top
TP10 "Socket" 5006 1710,140 r90 top
TP11 "Socket" 5006 278,590 r0 top
TP12 "Socket" 5006 2167.5,140 r90 top
TP13 "Socket" 5006 118,590 r90 top
TP14 "Socket" 5006 2320,140 r90 top
TP15 "Socket" 5006 2480,895 r90 top
TP16 "Socket" 5006 2015,140 r90 top
TP17 "Socket" 5006 1165,1855 r90 top
TP18 "Socket" 5006 280,965 r90 top
TP19 "Socket" 5006 3165,415 r90 top
TP23 "Socket" 5006 3625,2720 r90 top
TP24 "Socket" 5006 3775,145 r90 top
TP25 "Socket" 5006 330,2400 r90 top
TP26 "Socket" 5006 3610,145 r90 top
TP27 "Socket" 5006 3420,2720 r90 top
TP28 "Socket" 5006 4720,170 r90 top
U1 "SN75HVD12DR" SOIC127P599X175-8N 930,690 r180 top
U2 "Yost Lab 3 Space Sensor" "Yost 3 Space Sensor" 2350,1060 r270 top
U3 "SN65HVD251DRG4" SOIC127P599X175-8N 1395,590 r180 top
U4 "Archer M+" "Archer M+" 1610,1485 r90 top
U5_FET1 "SI8261AAC-C-ISR" SOIC127P599X175-8N 4825,2387.01 r0 bottom (schematic designator U5)
U5_FET2 "SI8261AAC-C-ISR" SOIC127P599X175-8N 3925,2387.01 r0 bottom (schematic designator U5)
U5_FET3 "SI8261AAC-C-ISR" SOIC127P599X175-8N 4825,1937.01 r0 bottom (schematic designator U5)
U5_FET4 "SI8261AAC-C-ISR" SOIC127P599X175-8N 3925,1937.01 r0 bottom (schematic designator U5)
U5_FET5 "SI8261AAC-C-ISR" SOIC127P599X175-8N 4825,1487.01 r0 bottom (schematic designator U5)
U5_FET6 "SI8261AAC-C-ISR" SOIC127P599X175-8N 3925,1487.01 r0 bottom (schematic designator U5)
U5_FET7 "SI8261AAC-C-ISR" SOIC127P599X175-8N 4825,1037.01 r0 bottom (schematic designator U5)
U5_FET8 "SI8261AAC-C-ISR" SOIC127P599X175-8N 3925,1037.01 r0 bottom (schematic designator U5)
U5_FET9 "SI8261AAC-C-ISR" SOIC127P599X175-8N 4825,587.01 r0 bottom (schematic designator U5)
U5_FET10 "SI8261AAC-C-ISR" SOIC127P599X175-8N 3925,587.01 r0 bottom (schematic designator U5)
U6 "M74VHC1GT14DFT2G" SOT65P210X110-5N 1530,860 r0 top
U7 "CAT24C256WI-GT3" SOIC127P599X175-8N 2760,945 r90 top
U8 "MCP6284-E/SL" SOIC127P600X175-14N 1115,2406.65 r90 top
U9 "LMZM23601" MODULE_LMZM23600V3SILT 3055,1265 r90 top
Vbat "206832-0202" 206832-0202 3275,100 r270 top

## Footprints (in the part's own frame and the unit in brackets; to place one, negate y for a bottom-side part, rotate by r counter-clockwise, add the part's x,y. Pads: shape width x height; smd on the part's side, far side on the other; paste and mask are expansions set on the pad)
0402 [mm] "Chip Capacitor, Body 1.0x0.5mm, IPC High Density"
  rect 0.6x0.5 smd: 1(-0.5,0) 2(0.5,0)
  body extent -0.55,-0.3 0.55,0.3, height 1.3
0402-A [mm] "Chip Inductor, Body 1.0x0.5mm, IPC High Density"
  rect 0.6x0.5 smd: 1(-0.5,0) 2(0.5,0)
  silkscreen extent -1.1,-0.15 -1.1,0.15, body extent -0.55,-0.3 0.55,0.3, height 0.55
5006 [mil]
  round 120 hole 72: 1(0,0)
43045-0426 [mil]
  round 55 hole 40: 1(59,-59.06) 2(-59,-59.06) 3(59,59.06) 4(-59,59.06)
  round 0 hole 40: None(-177,96) None(177,96)
  oval 100x150 hole 95: None(-143.5,0) None(143.5,0)
  silkscreen extent -205,-156 205,134
43650-0220 [mil]
  round 55 hole 40: 1(59,0) 2(-59,0)
  oval 100x150 hole 95: None(-143.5,0) None(143.5,0)
  silkscreen extent -205,-97 205,85
43650-0320 [mil]
  round 55 hole 40: 1(118,0) 2(0,0) 3(-118,0)
  oval 100x150 hole 95: None(-202.5,0) None(202.5,0)
  silkscreen extent -264,-97 264,85
95278-101B46LF [mm]
  rect 1.27x2.54 smd: 1(0,0) 2(0,-5.46) 3(2.54,0) 4(2.54,-5.46) 5(5.08,0) 6(5.08,-5.46) 7(7.62,0) 8(7.62,-5.46) 9(10.16,0) 10(10.16,-5.46) 11(12.7,0) 12(12.7,-5.46) 13(15.24,0) 14(15.24,-5.46) 15(17.78,0) 16(17.78,-5.46) 17(20.32,0) 18(20.32,-5.46) 19(22.86,0) 20(22.86,-5.46) 21(25.4,0) 22(25.4,-5.46) 23(27.94,0) 24(27.94,-5.46) 25(30.48,0) 26(30.48,-5.46) 27(33.02,0) 28(33.02,-5.46) 29(35.56,0) 30(35.56,-5.46) 31(38.1,0) 32(38.1,-5.46) 33(40.64,0) 34(40.64,-5.46) 35(43.18,0) 36(43.18,-5.46) 37(45.72,0) 38(45.72,-5.46) 39(48.26,0) 40(48.26,-5.46) 41(50.8,0) 42(50.8,-5.46) 43(53.34,0) 44(53.34,-5.46) 45(55.88,0) 46(55.88,-5.46)
206832-0202 [mm]
  rect 1.8x1.8 hole 1.02: 1(0,-1.5)
  round 1.8 hole 1.02: 2(0,1.5)
  silkscreen extent -2,-4.4 2,3.43
"Archer M+" [mil]
  round 60 hole 30: 1(-150,0) 2(-50,0) 3(50,0) 4(150,0)
  silkscreen extent -276,-39 276,748
CAPC3216X180N [mm]
  rect 1.44x1.82 smd: 1(-1.336,0) 2(1.336,0)
  silkscreen extent -0.29,-0.9 0.29,0.9
DPAK127P_600X120-5N [mm]
  rect 3.47x4.8 smd: 1(0,1.06)
  rect 0.6x1.62 smd: 2(1.905,-2.65) 3(-1.905,-2.65) 3(-0.635,-2.65) 3(0.635,-2.65)
  silkscreen extent -3.1,-3.1 2.45,2.11
HDR1X2 [mm] "Connector; Header; 2 Position"
  rect 1.5x1.5 hole 0.9: 1(0,0)
  round 1.5 hole 0.9: 2(2.54,0)
  silkscreen extent -1.27,-1.27 3.81,1.27
"JUMPER BLOCK" [mil]
  round 60 hole 30: 1(-70.71,70.71) 2(0,100) 3(70.71,70.71) 4(0,0)
MODULE_LMZM23600V3SILT [mm]
  rect 0.65x0.3 smd: 1(-1.525,1.2) 2(-1.525,0.6) 3(-1.525,0) 4(-1.525,-0.6) 5(-1.525,-1.2) 6(1.525,-1.2) 7(1.525,-0.6) 8(1.525,0) 9(1.525,0.6) 10(1.525,1.2)
  rect 0.7x2.9 smd: 11(-0.175,0)
  round 0.3 hole 0.2: 12(-0.175,1.03) 13(-0.175,0) 14(-0.175,-1.03)
  silkscreen extent -2.5,-1.76 1.9,1.76
MTGH200C125D_PL [mil] "MTGH200C125D_PL"
  round 175 hole 125 mask+2: 1(-15.5,0)
RESC3116X65N [mm]
  rect 1.14x1.77 smd: 1(-1.44,0) 2(1.44,0)
  silkscreen extent -0.55,-0.88 0.55,0.88
SOIC127P599X175-8N [mm]
  rect 1.97x0.6 smd: 1(-2.47,1.905) 2(-2.47,0.635) 3(-2.47,-0.635) 4(-2.47,-1.905) 5(2.47,-1.905) 6(2.47,-0.635) 7(2.47,0.635) 8(2.47,1.905)
  silkscreen extent -4.14,-2.52 1.95,2.52
SOIC127P600X175-14N [mm]
  rrect25% 1.9x0.6 smd: 1(-2.455,3.81) 2(-2.455,2.54) 3(-2.455,1.27) 4(-2.455,0) 5(-2.455,-1.27) 6(-2.455,-2.54) 7(-2.455,-3.81) 8(2.455,-3.81) 9(2.455,-2.54) 10(2.455,-1.27) 11(2.455,0) 12(2.455,1.27) 13(2.455,2.54) 14(2.455,3.81)
  silkscreen extent -4.45,-4.43 1.95,4.51
SOT65P210X110-5N [mm]
  rect 1.17x0.4 smd: 1(-0.97,0.65) 2(-0.97,0) 3(-0.97,-0.65) 4(0.97,-0.65) 5(0.97,0.65)
  silkscreen extent -2.2,-1.17 0.63,1.17
SOT95P237X112-3N [mm]
  rect 1.23x0.59 smd: 1(-1.06,0.95) 2(-1.06,-0.95) 3(1.06,0)
  silkscreen extent -2.2,-1.56 0.7,1.56
THRMC0603X33N [mm]
  rect 0.65x1.3 smd: 1(0.325,0) 3(1.575,0)
  silkscreen extent -0.25,-0.64 -0.25,0.64
V2PM12HM3/H [mm]
  rect 2x1.1 smd: 1(0,0)
  rect 0.8x0.8 smd: 3(1.9,0)
  silkscreen extent -1.3,-0.63 -1.3,0.64
"Yost 3 Space Sensor" [mil]
  rect 85x90 smd: 1(0,0) 2(0,-100) 3(0,-200) 4(0,-300) 5(0,-400) 6(0,-500) 7(560.04,-500) 8(560.04,-400) 9(560.04,-300) 10(560.04,-200) 11(560.04,-100) 12(560.04,0)

## Part data
5V _FET7 _FET8 FAN FET1 FET2 FET3 FET4 FET5 FET6 FET9 FET10: library part "Header 2", "Header, 2-Pin", Vendor Part Number=WM14584-ND, LatestRevisionDate=17-Jul-2002, LatestRevisionNote="Re-released for DXP Platform.", Publisher="Altium Limited"
A0 A1 A2 A3: library part "Header 3", "Header, 3-Pin", Vendor Part Number=WM7499-ND, LatestRevisionDate=17-Jul-2002, LatestRevisionNote="Re-released for DXP Platform.", Publisher="Altium Limited"
BMS RS485 TelemRadio: library part "Header 2X2", "Header, 2-Pin, Dual row", Vendor Part Number=WM10681-ND, LatestRevisionDate=17-Jul-2002, LatestRevisionNote="Re-released for DXP Platform.", Publisher="Altium Limited"
C1 C3 C5 C7 C11 C13_FET1 C13_FET2 C13_FET3 C13_FET4 C13_FET5 C13_FET6 C13_FET7 C13_FET8 C13_FET9 C13_FET10: "Capacitor", Manufacturer Part Number=CL31B105KCHNNNE, Vendor Part Number=1276-1838-1-ND
C2 C4 C6 C8 C9 C10 C12 C14_FET1 C14_FET2 C14_FET3 C14_FET4 C14_FET5 C14_FET6 C14_FET7 C14_FET8 C14_FET9 C14_FET10: "Capacitor", Manufacturer Part Number=CL31A106MBHNNNE, Vendor Part Number=1276-6736-1-ND, Voltage Rating=50V
C15: "Capacitor", Manufacturer Part Number=CL31A226KAHNNNE, Vendor Part Number=1276-3047-1-ND
CommsDisable: "Header, 2-Pin", DNP=DNP, LatestRevisionDate=17-Jul-2002, LatestRevisionNote="Re-released for DXP Platform.", Publisher="Altium Limited"
D1_FET1 D1_FET2 D1_FET3 D1_FET4 D1_FET5 D1_FET6 D1_FET7 D1_FET8 D1_FET9 D1_FET10: library part "Diode 10TQ040", "TVS", Manufacturer Part Number=V2PM12HM3/H, Vendor Part Number=V2PM12HM3/HGICT-ND
D3_FET1 D3_FET2 D3_FET3 D3_FET4 D3_FET5 D3_FET6 D3_FET7 D3_FET8 D3_FET9 D3_FET10: library part "Diode 10TQ040", "TVS", Manufacturer Part Number=D12V0H1U2LP1610-7, Vendor Part Number=D12V0H1U2LP1610-7DIDKR-ND
D4_FET1 D4_FET2 D4_FET3 D4_FET4 D4_FET5 D4_FET6 D4_FET7 D4_FET8 D4_FET9 D4_FET10 D5 D6 D7 D8: "Typical INFRARED GaAs LED", Color=Red, Manufacturer Part Number=150040RS73240, Vendor Part Number=732-11991-1-ND, I=20mA, Vf=2V
D9 D10 D12 D13 D14 D15 D16 D19 D20: library part "Diode 10TQ040", "TVS", Manufacturer Part Number=CPDUC5V0R-HF, Vendor Part Number=641-1764-1-ND
D11 D17 D18: library part "Diode 10TQ040", "TVS", Manufacturer Part Number=SP1103C-01UTG, Vendor Part Number=F10154CT-ND
L1: Manufacturer Part Number=MPZ1005S300CT000, Vendor Part Number=445-2979-1-ND
P8: library part HDR_46_F_2_0.1_0.1, "CONN HEADER FMAL 46PS.1\" DL GOLD", Color=Black, Manufacturer="Sullins Connector Solutions", Manufacturer Part Number=S7126-ND, Vendor Part Number=95278-101-46LF, Category="Connectors, Interconnects", ComponentLink1Description=http://www.sullinscorp.com/drawings/78_P(N)PxCxxxLFBN-RC,_10492-G.pdf, ComponentLink1URL=http://www.sullinscorp.com/drawings/78_P(N)PxCxxxLFBN-RC,_10492-G.pdf, Connector Type=Header, Contact Finish=Gold, Contact Finish Thickness=Flash, Contact Type="Female Socket", Fastening Type=-, Features=-, Mounting Type="Through Hole", Number of Positions=46, Number of Positions Loaded=All, Number of Rows=2, Packaging=Bulk, Pitch="0.100\" (2.54mm)", Pricing 1="1=2.75, 10=2.325, 25=2.2196, 50=2.0084, 100=1.7969, 250=1.58552, 500=1.4798, 1000=1.3741, 2500=1.32125 (USD)", RoHS="RoHS Compliant", Row Spacing="0.100\" (2.54mm)", Stock 1=750, Supplier 1=Digi-Key, Supplier Part Number 1=S7126-ND, Termination=Solder
P9: library part HDR_46_F_2_0.1_0.1, "CONN HEADER FMAL 46PS.1\" DL GOLD", Color=Black, Manufacturer="Sullins Connector Solutions", Supplier Part Number 1=S7126-ND, Vendor Part Number=95278-101-46LF, Category="Connectors, Interconnects", ComponentLink1Description=http://www.sullinscorp.com/drawings/78_P(N)PxCxxxLFBN-RC,_10492-G.pdf, ComponentLink1URL=http://www.sullinscorp.com/drawings/78_P(N)PxCxxxLFBN-RC,_10492-G.pdf, Connector Type=Header, Contact Finish=Gold, Contact Finish Thickness=Flash, Contact Type="Female Socket", Fastening Type=-, Features=-, Mounting Type="Through Hole", Number of Positions=46, Number of Positions Loaded=All, Number of Rows=2, Packaging=Bulk, Pitch="0.100\" (2.54mm)", Pricing 1="1=2.75, 10=2.325, 25=2.2196, 50=2.0084, 100=1.7969, 250=1.58552, 500=1.4798, 1000=1.3741, 2500=1.32125 (USD)", RoHS="RoHS Compliant", Row Spacing="0.100\" (2.54mm)", Stock 1=750, Supplier 1=Digi-Key, Termination=Solder
PWR1 PWR2 Vbat: library part "Header 2", "Header, 2-Pin", Vendor Part Number=900-2068320202-ND, LatestRevisionDate=17-Jul-2002, LatestRevisionNote="Re-released for DXP Platform.", Manufacturer Part Number=206832-0202, Publisher="Altium Limited"
Q1_FET1 Q1_FET2 Q1_FET3 Q1_FET4 Q1_FET5 Q1_FET6 Q1_FET7 Q1_FET8 Q1_FET9 Q1_FET10: library part MOSFET-N, "N-Channel MOSFET", Vendor Part Number=1727-8475-1-ND, LatestRevisionDate=17-Jul-2002, LatestRevisionNote="Re-released for DXP Platform.", Manufacturer Part Number=PSMN011-100YSFX, PackageDescription="TO, Flat Index; 3 In-Line, Axial Leads; Body Dia. 4.6mm; Lead Dia. 0.5 mm (max)", PackageReference=E3, PackageVersion=1995/1996, Published=8-Jun-2000, Publisher="Altium Limited"
Q2: library part MOSFET-N, "N-Channel MOSFET", Vendor Part Number=SSM3K339RLFCT-ND, Manufacturer Part Number=SSM3K339R,LF
Q3: library part PMOS-2, "P-Channel Power MOSFET", Vendor Part Number=SSM3J338RLFCT-ND, Manufacturer Part Number=SSM3J338R
R1_FET1 R1_FET2 R1_FET3 R1_FET4 R1_FET5 R1_FET6 R1_FET7 R1_FET8 R1_FET9 R1_FET10 R9 R10 R22_FET1 R22_FET2 R22_FET3 R22_FET4 R22_FET5 R22_FET6 R22_FET7 R22_FET8 R22_FET9 R22_FET10 R25: "Resistor", Manufacturer Part Number=RC0402FR-0760R4L, Tolerance=1%, Vendor Part Number=311-60.4LRCT-ND
R6 R19 R23 R24 R31: "Resistor", Manufacturer Part Number=RC0402FR-074K7L, Tolerance=1%, Vendor Part Number=311-4.7KLRCT-ND
R7 R8 R20 R21 R27 R28 R29 R30: "Resistor", Manufacturer Part Number=RC0402FR-070RL, Tolerance=1%, Vendor Part Number=311-0.0LRCT-ND
  R7 R21 R27 R28 R29 R30: DNP=DNP
R11 R37: "Resistor", Manufacturer Part Number=YAG3043CT-ND, Tolerance=1%, Vendor Part Number=RC0402FR-071K65L
R12 R13 R14: "Resistor", Manufacturer Part Number=RC0402FR-071K65L, Tolerance=1%, Vendor Part Number=YAG3043CT-ND
R15 R16 R17 R18 R36_FET1 R36_FET2 R36_FET3 R36_FET4 R36_FET5 R36_FET6 R36_FET7 R36_FET8 R36_FET9 R36_FET10: "Resistor", Manufacturer Part Number=RC0402FR-071K8L, Tolerance=1%, Vendor Part Number=YAG3256CT-ND
R32 R33 R34: "Resistor", Manufacturer Part Number=RC0402FR-072K49L, Tolerance=1%, Vendor Part Number=311-2.49KLRCT-ND
R35: "Resistor", Manufacturer Part Number=RC0402FR-07200RL, Tolerance=1%, Vendor Part Number=311-200LRCT-ND
R38: "Resistor", Manufacturer Part Number=RC0402FR-07150RL, Tolerance=1%, Vendor Part Number=311-150LRCT-ND
TP1 TP2 TP3 TP4 TP5 TP6 TP7 TP8 TP9 TP10 TP11 TP12 TP13 TP14 TP15 TP16 TP17 TP18 TP19 TP23 TP24 TP25 TP26 TP27 TP28: Manufacturer Part Number=5006, Vendor Part Number=36-5006-ND, LatestRevisionDate=17-Jul-2002, LatestRevisionNote="Re-released for DXP Platform.", Publisher="Altium Limited"
U1: Manufacturer Part Number=THVD1450DR, Vendor Part Number=296-50395-1-ND, Vendor=Digikey
U3: Vendor Part Number=296-21805-1-ND, Manufacturer Part Number=SN65HVD251DRG4
U4: Vendor Part Number="Archer +"
U5_FET1 U5_FET2 U5_FET3 U5_FET4 U5_FET5 U5_FET6 U5_FET7 U5_FET8 U5_FET9 U5_FET10: Vendor Part Number=336-4490-1-ND, Manufacturer Part Number=SI8261AAC-C-ISR, Vendor=Digikey
U6: Vendor Part Number=M74VHC1GT14DFT2GOSCT-ND, Manufacturer Part Number=M74VHC1GT14DFT2G
U7: Vendor Part Number=CAT24C256WI-GT3OSCT-ND, Manufacturer Part Number=CAT24C256WI-GT3, Vendor=Digikey
U8: "General Purpose Amplifier 4 Circuit Rail-to-Rail 14-SOIC", Package="SOIC-14 Microchip", Vendor Part Number=MCP6284-E/SL-ND, Availability=Warning, DigiKey-Purchase-URL=https://snapeda.com/shop?store=DigiKey&id=282490, Manufacturer Part Number=MCP6284-E/SL, MF=Microchip, Mouser-Purchase-URL=https://snapeda.com/shop?store=Mouser&id=282490, MP=MCP6284-E/SL, Price=None, SnapEDA_Link=https://www.snapeda.com/parts/MCP6284-E/SL/Microchip/view-part/282490/?ref=snap
U9: Manufacturer Part Number=LMZM23601SILT, Vendor Part Number=296-49460-1-ND
U2: Manufacturer Part Number="Yost Lab 3 Space Sensor", Vendor Part Number="Yost Lab 3 Space Sensor"

## Via types
v1: diameter 26, hole 13.5, Top Layer to Bottom Layer, 173 vias
v2: diameter 40.16, hole 40.16, Top Layer to Bottom Layer, 3 vias
v3: diameter 175, hole 125, Top Layer to Bottom Layer, 2 vias

## Nets (pads, with @x,y where several pads share a name; then routed paths per layer and width w, separated by ;. In a path a pad name is that pad's centre, name@x,y a point inside that pad or via, vN(x,y) a via of type N, cw(c..) or ccw(c..) an arc to the next point about the centre after c; other vN are vias at no path point)
5V: 5V.2 A0.3 A1.3 A2.3 A3.3 BMS.2 C1.2 C2.2 C3.2 C4.2 C5.2 C6.2 C7.2 C8.2 C11.2 C12.2 CommsDisable.1 D8.1 FAN.2 Q3.2 R7.1 R19.1 TelemRadio.2 TP25.1 U1.8 U2.6 U3.3 U6.5 U8.4 | length 2373.7
  Top Layer w10: C4.2@625,677.4 v1(675,677.4) 692.6,677.4 755,615 U1.8@832.76,615 ; U8.4@1115,2310 v1(1115,2235) 1115,2215.31 1155.32,2175 C1.2@1168.31,2175 1172.4,2170.91 C2.2@1172.4,2075 ; v1(1140,515) 1140,520.36 1145.36,515 R7.1@1175.63,515 ; C12.2@1250,907.6 1382.4,907.6 v1(1420,870) ; Q3.2@1403.27,1047.6 1403.27,1016.73 1468.31,951.69 v1(1502.09,951.69) U6.5@1568.19,885.59 ; U3.3@1492.24,615 1605,615 v1(1615,625) C7.2@1615,666.69 1615,692.6 C8.2@1552.6,755 ; v1(1630,795) R19.1@1630,845.32 ; v1(1785,1070) 1840,1070 U2.6@1850,1060 ; v1(2975,2150) 2995,2130 D8.1@2995,2110
  Top Layer w30: U2.6@1850,1060 1850,915 2005.31,759.69 C6.2@2585,759.69
12V: C13_FET1.2 C13_FET2.2 C13_FET3.2 C13_FET4.2 C13_FET5.2 C13_FET6.2 C13_FET7.2 C13_FET8.2 C13_FET9.2 C13_FET10.2 C14_FET1.2 C14_FET2.2 C14_FET3.2 C14_FET4.2 C14_FET5.2 C14_FET6.2 C14_FET7.2 C14_FET8.2 C14_FET9.2 C14_FET10.2 C15.2 R37.2 U5_FET1.8 U5_FET2.8 U5_FET3.8 U5_FET4.8 U5_FET5.8 U5_FET6.8 U5_FET7.8 U5_FET8.8 U5_FET9.8 U5_FET10.8 U9.6 | length 8424.1
  Top Layer w10: v1(3080,315) 3069.5,325.5 3069.5,734.5 3230,895 3230,1305 3210.31,1324.69 R37.2@3185,1324.69 3185,1385 3165,1405 C15.2@3092.6,1405 3102.24,1395.35 U9.6@3102.24,1325.04 ; v1(3730,315) 3850,315 v1(3915,380) ; v1(3730,765) 3850,765 v1(3915,830) ; v1(3730,1225) 3850,1225 v1(3915,1290) ; v1(3735,1655) 3840,1655 v1(3915,1730) 3967,1678 4118,1678 4150,1710 4150,2027.84 4063.28,2114.56 3980.44,2114.56 3915,2180 v1(3915,2215) ; v1(4625,1640) 4725,1640 v1(4815,1730) ; v1(4630,315) 4750,315 v1(4815,380) ; v1(4630,1195) 4725,1195 v1(4815,1285) ; v1@4635,750 4735,750 v1(4815,830) ; v1(4635,2110) 4735,2110 v1(4815,2190)
  Bottom Layer w10: v1(3080,315) v1(3730,315) ; v1(3915,380) 3915,377.6 C14_FET10.2@3972.6,320 C14_FET10.2@3976.69,324.09 ; v1(3915,830) 3934.69,830 C13_FET8.2@3976.69,872.01 ; v1(3915,1290) 3915,1310 3927.01,1322.01 C13_FET6.2@3976.69,1322.01 ; v1(3915,1730) 3962.6,1730 3972.6,1720 ; v1(3915,2215) 3965.59,2215 C13_FET2.2@3972.6,2222.01 ; C14_FET6.2@3972.6,1220 3972.6,1317.91 C13_FET6.2@3976.69,1322.01 ; C14_FET4.2@3972.6,1670 3972.6,1720 ; C14_FET2.2@3972.6,2120 C13_FET2.2@3972.6,2222.01 ; C14_FET8.2@3977.6,770 3976.69,770.91 C13_FET8.2@3976.69,872.01 ; U5_FET10.8@4022.24,512.01 4022.24,467.56 C13_FET10.2@3976.69,422.01 C14_FET10.2@3976.69,324.09 ; U5_FET8.8@4022.24,962.01 4022.24,917.56 C13_FET8.2@3976.69,872.01 ; U5_FET6.8@4022.24,1412.01 4022.24,1367.56 C13_FET6.2@3976.69,1322.01 ; U5_FET4.8@4022.24,1862.01 4022.24,1817.56 C13_FET4.2@3976.69,1772.01 3972.6,1767.91 3972.6,1720 ; U5_FET2.8@4022.24,2312.01 3972.6,2262.36 C13_FET2.2@3972.6,2222.01 ; v1(4630,315) 4610,335 3987.6,335 C14_FET10.2@3976.69,324.09 ; v1(4815,380) 4834.69,380 C13_FET9.2@4872.6,417.91 ; v1(4815,830) 4857.01,872.01 C13_FET7.2@4872.6,872.01 ; v1(4815,1285) 4852.01,1322.01 C13_FET5.2@4872.6,1322.01 ; v1(4815,1730) 4815,1755 4832.01,1772.01 C13_FET3.2@4872.6,1772.01 ; v1(4815,2190) 4815,2210 4827.01,2222.01 C13_FET1.2@4876.69,2222.01 ; C14_FET9.2@4872.6,320 C13_FET9.2@4872.6,417.91 ; C14_FET7.2@4872.6,770 C13_FET7.2@4872.6,872.01 ; C14_FET5.2@4872.6,1220 C13_FET5.2@4872.6,1322.01 ; C14_FET3.2@4872.6,1670 C13_FET3.2@4872.6,1772.01 ; C14_FET1.2@4872.6,2120 4872.6,2217.91 C13_FET1.2@4876.69,2222.01 ; U5_FET9.8@4922.24,512.01 4922.24,467.56 C13_FET9.2@4876.69,422.01 C13_FET9.2@4872.6,417.91 ; U5_FET7.8@4922.24,962.01 4922.24,939.57 4872.6,889.92 C13_FET7.2@4872.6,872.01 ; U5_FET5.8@4922.24,1412.01 4922.24,1389.57 4872.6,1339.92 C13_FET5.2@4872.6,1322.01 ; U5_FET3.8@4922.24,1862.01 4922.24,1839.57 4872.6,1789.92 C13_FET3.2@4872.6,1772.01 ; U5_FET1.8@4922.24,2312.01 4922.24,2267.56 C13_FET1.2@4876.69,2222.01
  other v1: 4625,750
485n: D10.3 RS485.3 TP5.1 U1.7 | length 1680.8
  Top Layer w10: TP5.1@118,776.5 209.5,685 320,685 465,540 465,455 540,380 875,380 890,395 ; U1.7@832.76,665 875,665 890,650 890,395 ; RS485.3@948,271.06 948,337 890,395
  Bottom Layer w10: D10.3@925,75 905,95 905,228.06 RS485.3@948,271.06
485p: D9.1 RS485.4 TP6.1 U1.6 | length 1422.7
  Top Layer w10: TP6.1@278,776.5 443.5,776.5 490,730 ; v1(695,460) 695,525 490,730 ; U1.6@832.76,715 725,715 710,730 490,730
  Bottom Layer w10: v1(695,460) 695,374.55 739.03,330.52 739.48,330.52 745,325 776.06,325 RS485.4@830,271.06 ; RS485.4@839.51,271.06 RS485.4@830,271.06 ; D9.1@875,75 875,226.06 RS485.4@830,271.06
A0: A0.2 D12.1 U8.3 | length 1012.5
  Top Layer w10: A0.2@445,2700 555,2590 1015,2590 1041.19,2563.81 1041.19,2458.85 1065,2435.04 U8.3@1065,2310
  Bottom Layer w10: D12.1@410,2630 430,2630 445,2645 A0.2@445,2700
A0_18: P9.39 R11.1 R15.2 TP1.1 | length 504.8
  Top Layer w10: v1(2650,505) 2640,495 R15.2@2640,469.69 R11.1@2670,469.68
  Bottom Layer w10: v1(2650,505) 2670,485 2670,370 2715,325 2745,325 2777.5,292.5 TP1.1@2777.5,140
A0_out: R11.2 U8.1 U8.2 | length 3814.6
  Top Layer w10: v1(950,880) 932,898 932,2277 U8.1@965,2310 U8.2@1015,2310 ; v1(2670,265) R11.2@2670,430.31
  Bottom Layer w10: v1(950,880) 1115,715 1270,715 1325,660 1325,500 1336.48,488.52 1981.48,488.52 2032,438 2032,333 2122,243 2648,243 v1(2670,265)
A1: A1.2 D13.1 U8.5 | length 550.4
  Top Layer w10: A1.2@1010,2700 1141.19,2568.81 1141.19,2438.46 1165,2414.64 v1(1165,2380) U8.5@1165,2310
  Bottom Layer w10: D13.1@975,2630 995,2630 1010,2645 A1.2@1010,2700
A1_18: P9.40 R12.1 R16.2 TP2.1 | length 1059.6
  Top Layer w10: R12.1@2520,469.68 R16.2@2550,469.69 2550,495 v1(2540,505) ; v1(2730,215) 2780,265 2780,470 v1(2745,505)
  Bottom Layer w10: v1(2540,505) 2540,535 2520,555 2520,665 2540,685 2655,685 2669,671 P9.40@2669,607.48 2715,561.48 2715,535 v1(2745,505) ; TP2.1@2625,140 2655,140 v1(2730,215)
A1_out: R12.2 U8.6 U8.7 | length 3690.3
  Top Layer w10: v1(1110,850) 1110,1655 1388,1933 1388,2222 1300,2310 U8.7@1265,2310 U8.6@1215,2310 ; v1(2520,290) R12.2@2520,430.31
  Bottom Layer w10: v1(1110,850) 1220,740 1365,740 1410,695 1410,534.52 1439,505.52 2092.48,505.52 2120,478 2120,320 2180,260 2475.36,260 2505.36,290 v1(2520,290)
A2: A2.2 D14.1 U8.10 | length 612.1
  Top Layer w10: U8.10@1165,2503.31 1165,2545 1200,2580 1392.86,2580 1512.86,2700 A2.2@1575,2700
  Bottom Layer w10: D14.1@1540,2630 1560,2630 1575,2645 A2.2@1575,2700
A2_18: P9.37 R13.1 R17.2 TP3.1 | length 804.6
  Top Layer w10: TP3.1@2472.5,140 2437,175.5 2437,487 2480,530 v1(2505,530) ; R13.1@2490,469.68 2490,515 v1(2505,530) ; R17.2@2580,469.69 2580,515 2565,530 v1(2505,530)
  Bottom Layer w10: v1(2505,530) 2505,475 2569,411 P9.37@2569,392.52
A2_out: R13.2 U8.8 U8.9 | length 3794.5
  Top Layer w10: v1(1165,850) 1127,888 1127,1647.96 1405,1925.96 1405,2384.69 1289.68,2500 1218.31,2500 U8.9@1215,2503.31 ; v1(2475,295) 2490,310 R13.2@2490,430.31
  Bottom Layer w10: v1(1165,850) 1258,757 1468,757 1520,705 1520,534 1529,525 2175,525 2230,470 2230,315 2265,280 2460,280 v1(2475,295) v1@2480,295
A3: A3.2 D15.1 U8.12 | length 1219.2
  Top Layer w10: U8.12@1065,2503.31 v1(1065,2580)
  Bottom Layer w10: v1(1065,2580) 2050.36,2580 2140,2669.64 A3.2@2140,2700
A3_18: P9.38 R14.1 R18.2 TP4.1 | length 936
  Top Layer w10: R18.2@2610,469.69 2610,520 2620,530 v1(2685,530) ; R14.1@2700,469.68 2700,515 v1(2685,530) ; TP4.1@2930,140 2930,435 2835,530 v1(2685,530)
  Bottom Layer w10: P9.38@2569,607.48 2569,586 2625,530 v1(2685,530)
A3_out: R14.2 U8.13 U8.14 | length 4120
  Top Layer w10: v1(915,870) 915,2453.31 U8.14@965,2503.31 U8.13@1015,2503.31 ; R14.2@2700,430.31 2700,305 2730,275 v1(2725,275)
  Bottom Layer w10: v1(915,870) 1095,690 1195,690 1225,660 1225,555 1295,485 1315.96,485 1329.44,471.52 1888.97,471.52 1906,454.49 1906,454 1932,428 1932,298.96 2004.96,226 2691,226 2725,260 v1(2725,275)
CANH: BMS.3 D19.1 R9.1 TP11.1 U3.7 | length 1983.5
  Top Layer w10: TP11.1@278,590 285,590 v1(525,350) 590,350 655,285 655,180 728,107 1102.25,107 1130,134.75 1130,330 1180,380 1265,380 1370,485 1370,555 1360,565 U3.7@1297.76,565 1233.31,565 1231.47,563.16 1227.84,563.16 R9.1@1214.68,550
  Bottom Layer w10: BMS.3@467.5,271.06 485,288.56 D19.1@485,345 520,345 v1(525,350)
CANL: BMS.4 D20.1 R10.2 TP13.1 U3.6 | length 2652.2
  Top Layer w10: TP13.1@118,590 118,465 ; v1(305,400) 183,400 118,465 ; R10.2@1214.69,585 1214.69,604.69 1225,615 U3.6@1297.76,615 1375,615 1395,595 1395,485 1265,355 1180,355 1150,325 1150,130.7 1109.3,90 265,90 118,237 118,465
  Bottom Layer w10: v1(305,400) 325.79,379.21 D20.1@325.79,345 325.79,294.77 BMS.4@349.5,271.06